# Altium PCB localizationBoard.PcbDoc
Units mm, origin at the board's own origin, x right, y up, seen from the top; angles counter-clockwise.
Board outline 152.4 x 101.6 mm, 2 copper layers (Top Layer, Bottom Layer); 48 components, 29 nets, 220 pads, 0 vias.
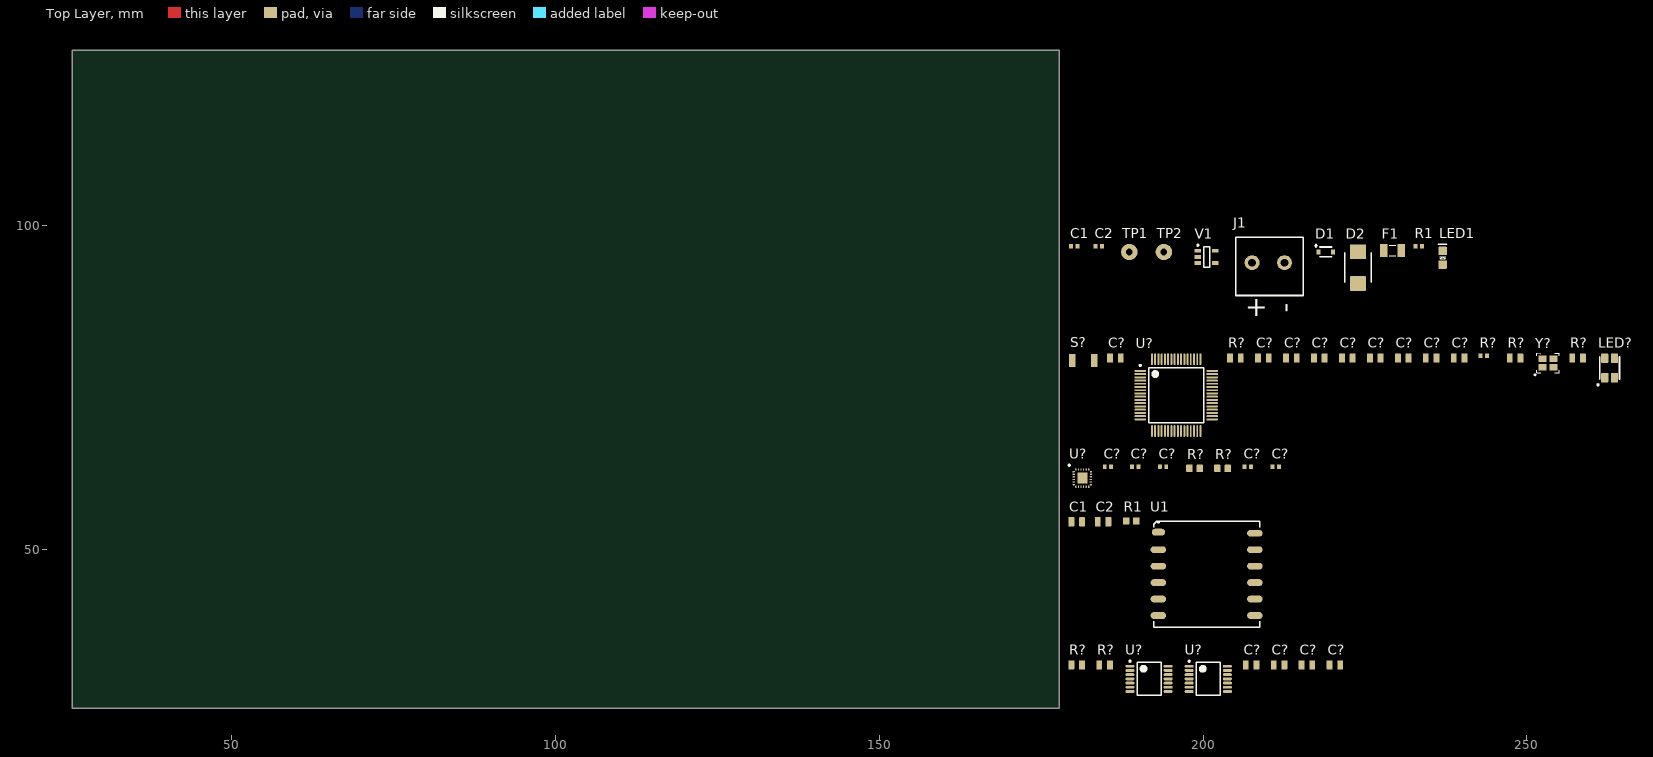
[diagram p0: Top Layer view]
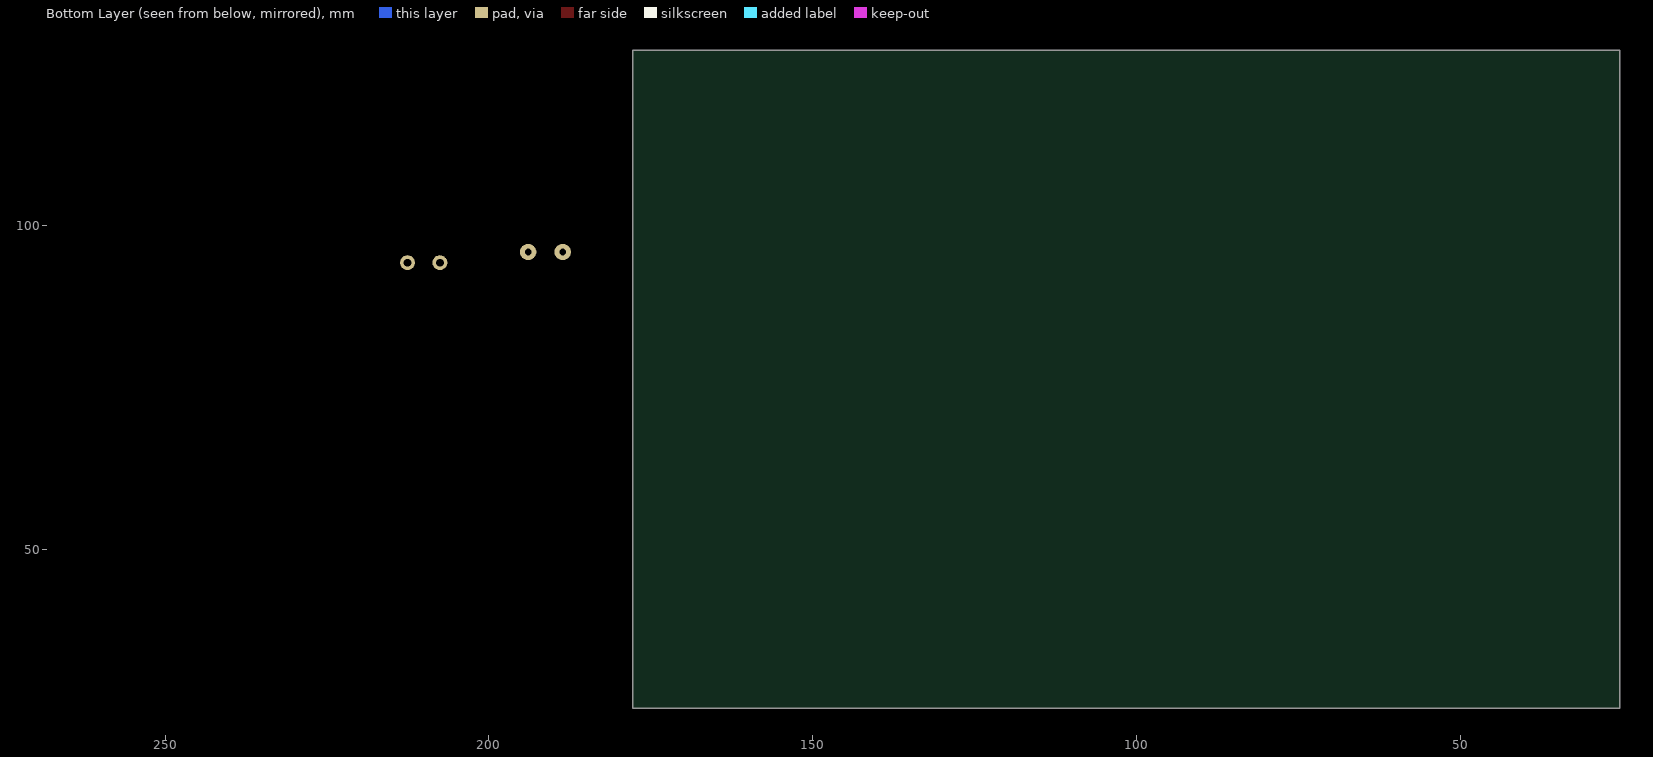
[diagram p1: Bottom Layer view, seen from below]

## Layer stack, top to bottom
Top Solder: solder mask 0.0102, Solder Resist, Dk 3.5
Top Layer: signal copper 0.0356
Dielectric 1: dielectric 0.32, FR-4, Dk 4.8
Bottom Layer: signal copper 0.0356
Bottom Solder: solder mask 0.0102, Solder Resist, Dk 3.5

## Board outline
25.4,25.4 177.8,25.4 177.8,127 25.4,127

## Design rules (kind name [scope] priority, off if disabled: settings)
Clearance [All] p1: gap=0.254 ignorepadtopadclearanceinfootprint=FALSE except(0: Arc-Hole Track-Hole SMDPad-Hole THPad-Hole Via-Hole Fill-Hole Poly-Hole Region-Hole Text-Hole)
PolygonConnect [All] p1: connectstyle=Relief reliefconductorwidth=0.254 reliefentries=4 polygonreliefangle="90 Angle" airgapwidth=0.254
RoutingVias [All] p1: holewidth=0.711 width=1.27 viastyle="Through Hole" minholewidth=0.711 minwidth=1.27 maxholewidth=0.711 maxwidth=1.27
SolderMaskExpansion [All] p1: expansion=0.102 istentingtop=FALSE
Width [All] p1: maxlimit=0.254 minlimit=0.254 preferedwidth=0.254
30 further rules are at their usual default settings.

## Components (designator, comment, footprint, x,y, rotation, side; value= is the part's Value field where it differs from the comment)
C1 "CAP_4.7uF_50V_0805" CAP0805 180.467,54.229 r0 top value=4.7μF
C1 "CAP_1UF_10V_0402_X5R" CAP0402 180.086,96.774 r0 top
C2 "CAP_0.1uF_50V_0805" CAP0805 184.531,54.229 r0 top value=0.1μF
C2 "CAP_1UF_10V_0402_X5R" CAP0402 183.896,96.774 r0 top
C? "CAP_1UF_10V_0402_X5R" CAP0402 206.883,62.738 r0 top
C? "CAP_1UF_10V_0402_X5R" CAP0402 193.802,62.738 r0 top
C? "CAP_1UF_10V_0402_X5R" CAP0402 211.201,62.738 r0 top
C? "CAP_0.1uF_100V_0805" CAP0805 186.436,79.502 r0 top value=0.1µF
C? "CAP_1UF_10V_0402_X5R" CAP0402 189.484,62.738 r0 top
C? "CAP_0.1uF_10V_0805" CAP0805 207.391,32.131 r0 top value=0.1uF
C? "CAP_0.1uF_10V_0805" CAP0805 211.709,32.131 r0 top value=0.1uF
C? "CAP_0.1uF_10V_0805" CAP0805 220.345,32.131 r0 top value=0.1uF
C? "CAP_1UF_10V_0402_X5R" CAP0402 185.293,62.738 r0 top
C? "CAP_0.1uF_10V_0805" CAP0805 216.027,32.131 r0 top value=0.1uF
C? "CAP_0.1uF_50V_0805" CAP0805 209.296,79.502 r0 top value=0.1μF
C? "CAP_1uF_50V_0805" CAP0805 235.204,79.502 r0 top value=1μF
C? "CAP_0.1uF_50V_0805" CAP0805 213.614,79.502 r0 top value=0.1μF
C? "CAP_0.1uF_50V_0805" CAP0805 230.886,79.502 r0 top value=0.1μF
C? "CAP_0.1uF_50V_0805" CAP0805 217.932,79.502 r0 top value=0.1μF
C? "CAP_4.7uF_50V_0805" CAP0805 226.568,79.502 r0 top value=4.7μF
C? "CAP_0.1uF_50V_0805" CAP0805 222.25,79.502 r0 top value=0.1μF
C? "CAP_0.1uF_50V_0805" CAP0805 239.522,79.502 r0 top value=0.1μF
D1 "DIO_SCHOTTKY_30V_800mA" SOD-323_UNIDIR 218.948,95.885 r0 top
D2 "TVS_DIODE_BIDIR_5V" TVS_DIODE_BIDIR_SMB 223.901,93.472 r90 top
F1 "FUSE_1A_1206" FUSE_1206 229.235,96.139 r0 top
J1 "CON_2POS_SCREW_TERM" 1935161 210.058,94.234 r0 top
LED1 "LED_GREEN" LED_0805_GREEN 236.982,94.996 r90 top
LED? "LED_RGB" LED_RGB 262.763,77.978 r0 top
R1 "RES_1kΩ_0603_5%" RES0603 188.087,54.356 r0 top value=1kΩ
R1 "" RES0402 233.299,96.774 r0 top value=120Ω
R? "RES_10kΩ_0603_5%" RES0603 197.866,62.484 r0 top value=10kΩ
R? "RES_10kΩ_0603_5%" RES0603 202.184,62.484 r0 top value=10kΩ
R? "RES_51kΩ_0805_5%" RES0805 184.785,32.131 r0 top value=51kΩ
R? "RES_51kΩ_0805_5%" RES0805 180.467,32.131 r0 top value=51kΩ
R? "RES_20Ω_0805_1%" RES0805 248.158,79.502 r0 top value=20Ω
R? "RES_20Ω_0805_1%" RES0805 257.81,79.502 r0 top value=20Ω
R? "RES_10kΩ_0805_5%" RES0805 204.978,79.502 r0 top value=10kΩ
R? "RES_120Ω_0402_5%" RES0402 243.332,79.883 r0 top value=120Ω
S? "SW_SPST_NO" B3U-1000P 181.483,79.121 r0 top
TP1 "TESTPOINT_LOOP" TESTPOINT_LOOP 188.595,95.885 r0 top
TP2 "TESTPOINT_LOOP" TESTPOINT_LOOP 193.929,95.885 r0 top
U1 "GNSS_Reciever_IC" L86_M33_GNSS_Reciever_IC 200.533,46.101 r0 top
U? "TXB0104PWR" "TXB0104PWR 4-bit bidirectional voltage-level translator" 200.787,29.972 r0 top
U? "TXB0104PWR" "TXB0104PWR 4-bit bidirectional voltage-level translator" 191.643,29.972 r0 top
U? "STM32F446RET6" STM_LQFP64_N 195.834,73.787 r0 top
U? "IC_9DOF_IMU_W24" "ICM20948 - 9DOFIMU" 181.356,60.96 r0 top
V1 "NCV8114ASN180T1G" 1.8V_Output_LDO 200.533,95.123 r0 top
Y? "CRYSTAL_25MHZ" SOIC254P1016X440-4N 253.238,78.74 r0 top

## Footprints (in the part's own frame and the unit in brackets; to place one, negate y for a bottom-side part, rotate by r counter-clockwise, add the part's x,y. Pads: shape width x height; smd on the part's side, far side on the other; paste and mask are expansions set on the pad)
1.8V_Output_LDO [mm] "Linear Voltage Regulator IC Positive Fixed 1 Output 300mA 5-TSOP"
  rect 1x0.6 smd: 1(-1.35,0.95) 2(-1.35,0) 3(-1.35,-0.95) 4(1.35,-0.95) 6(1.35,0.95)
  silkscreen extent -1.47,-1.6 0.45,1.92, body extent -0.85,-1.6 0.85,1.6, height 1.1
1935161 [mm] "TERM BLK 2POS SIDE ENTRY 5MM PCB"
  round 2.3 hole 1.2: 1(-2.5,0) 2(2.5,0)
  silkscreen extent -5.01,-5.06 5.39,3.94, body extent -5.01,-5.06 5.39,3.94, height 11.41
B3U-1000P [mm] "TACTILE SWITCH GREY"
  rrect15% 1x2 smd: 1(-1.7,0) 2(1.7,0)
  body extent -2,-1.25 2,1.25, height 1.6
CAP0402 [mm] "Chip Capacitor, Body 1x0.5mm, Height 0.35mm, IPC Medium Density"
  rrect15% 0.6x0.7 smd: 1(-0.5,0) 2(0.5,0)
  body extent -0.52,-0.28 0.52,0.28, height 0.54
CAP0805 [mm] "Chip Capacitor, Body 2.0x1.2mm, Height 0.45mm, IPC Medium Density"
  rrect15% 0.9x1.4 smd: 1(-0.825,0) 2(0.825,0)
  body extent -1.1,-0.73 1.1,0.73, height 1.39
FUSE_1206 [mil]
  rect 45x80 smd mask+1: 1(-52.5,0) 2(52.5,0)
  silkscreen extent -20,-32 20,32, body extent -65,-32 65,32, height 32
"ICM20948 - 9DOFIMU" [mm] "Accelerometer, Gyroscope, Magnetometer, 9 Axis Sensor I2C, SPI Output"
  oval 0.35x0.2 smd: 1(-1.35,1) 2(-1.35,0.6) 3(-1.35,0.2) 4(-1.35,-0.2) 5(-1.35,-0.6) 6(-1.35,-1) 13(1.3,-1) 14(1.3,-0.6) 15(1.3,-0.2) 16(1.3,0.2) 17(1.3,0.6) 18(1.3,1)
  oval 0.2x0.35 smd: 7(-1.025,-1.325) 8(-0.625,-1.325) 9(-0.225,-1.325) 10(0.175,-1.325) 11(0.575,-1.325) 12(0.975,-1.325) 19(0.975,1.325) 20(0.575,1.325) 21(0.175,1.325) 22(-0.225,1.325) 23(-0.625,1.325) 24(-1.025,1.325)
  rect 1.54x1.7 smd: 25(-0.025,0)
  silkscreen extent -2.15,1.88 -1.9,2.12, body extent -1.58,-1.55 1.52,1.55, height 1.05
L86_M33_GNSS_Reciever_IC [mm] "Navigation Galileo, GLONASS, GPS, GNSS Transceiver Module 1.575GHz, 1.601GHz Integrated, Ceramic Patch Surface Mount"
  oval 2.05x1.05 smd: 1(-7.45,6.525)
  oval 2.4x1.05 smd: 2(-7.45,3.81) 3(-7.45,1.27) 4(-7.45,-1.27) 5(-7.45,-3.81) 6(-7.45,-6.35) 7(7.45,-6.35) 8(7.45,-3.81) 9(7.45,-1.27) 10(7.45,1.27) 11(7.45,3.81) 12(7.45,6.35)
  silkscreen extent -8.2,-8.2 8.2,8.22, body extent -8,-8 8,8, height 7.15
LED_0805_GREEN [mm] "SMD, 2-Leads, Body 2x1.25mm"
  rrect20% 1.3x1.3 smd: 1(-1.05,0) 2(1.05,0)
  silkscreen extent -0.18,-0.63 2.11,0.64, body extent -1,-0.62 1,0.63, height 1.12
LED_RGB [mm]
  rrect20% 1.1x1.5 smd: 1(-0.75,-1.5) 2(-0.75,1.5) 3(0.75,1.5) 4(0.75,-1.5)
  silkscreen extent -1.92,-2.72 1.53,1.7, body extent -1.4,-1.75 1.4,1.75, height 1.89
RES0402 [mm] "Chip Resistor, Body 1x0.5mm, IPC Medium Density"
  rrect15% 0.6x0.7 smd: 1(-0.5,0) 2(0.5,0)
  body extent -0.5,-0.25 0.5,0.25, height 0.27
RES0603 [mm] "Chip Resistor, Body 1.6x0.8mm, IPC Medium Density"
  rrect15% 1x1.1 smd: 1(0,0) 2(1.6,0)
  body extent 0,-0.4 1.6,0.4, height 0.46
RES0805 [mm] "Chip Resistor, 2-Leads, Body 2.00x1.25mm, IPC High Density"
  rrect15% 0.9x1.4 smd: 1(-0.825,0) 2(0.825,0)
  body extent -1,-0.62 1,0.63, height 0.61
SOD-323_UNIDIR [mm]
  rect 0.63x0.83 smd: 1(-1.115,0) 2(1.115,0)
  silkscreen extent -1.73,-0.76 0.9,1.17, body extent -1.24,-0.62 1.24,0.62, height 1.1
SOIC254P1016X440-4N [mm]
  rrect15% 1.25x1 smd: 1(-0.85,-0.65) 2(0.85,-0.65) 3(0.85,0.65) 4(-0.85,0.65)
  silkscreen extent -2.11,-1.93 1.75,1.47, body extent -1.24,-0.85 1.24,0.85, height 0.56
STM_LQFP64_N [mm] "Thin QFP, 64-Leads, Body 10x10mm, Pitch 0.5mm, IPC Medium Density"
  oval 1.8x0.3 smd mask+0.05: 1(-5.55,3.75) 2(-5.55,3.25) 3(-5.55,2.75) 4(-5.55,2.25) 5(-5.55,1.75) 6(-5.55,1.25) 7(-5.55,0.75) 8(-5.55,0.25) 9(-5.55,-0.25) 10(-5.55,-0.75) 11(-5.55,-1.25) 12(-5.55,-1.75) 13(-5.55,-2.25) 14(-5.55,-2.75) 15(-5.55,-3.25) 16(-5.55,-3.75) 33(5.55,-3.75) 34(5.55,-3.25) 35(5.55,-2.75) 36(5.55,-2.25) 37(5.55,-1.75) 38(5.55,-1.25) 39(5.55,-0.75) 40(5.55,-0.25) 41(5.55,0.25) 42(5.55,0.75) 43(5.55,1.25) 44(5.55,1.75) 45(5.55,2.25) 46(5.55,2.75) 47(5.55,3.25) 48(5.55,3.75)
  oval 0.3x1.8 smd mask+0.05: 17(-3.75,-5.55) 18(-3.25,-5.55) 19(-2.75,-5.55) 20(-2.25,-5.55) 21(-1.75,-5.55) 22(-1.25,-5.55) 23(-0.75,-5.55) 24(-0.25,-5.55) 25(0.25,-5.55) 26(0.75,-5.55) 27(1.25,-5.55) 28(1.75,-5.55) 29(2.25,-5.55) 30(2.75,-5.55) 31(3.25,-5.55) 32(3.75,-5.55) 49(3.75,5.55) 50(3.25,5.55) 51(2.75,5.55) 52(2.25,5.55) 53(1.75,5.55) 54(1.25,5.55) 55(0.75,5.55) 56(0.25,5.55) 57(-0.25,5.55) 58(-0.75,5.55) 59(-1.25,5.55) 60(-1.75,5.55) 61(-2.25,5.55) 62(-2.75,5.55) 63(-3.25,5.55) 64(-3.75,5.55)
  silkscreen extent -5.67,-4.25 4.25,4.7, body extent -6,-5.99 6,6.01, height 1.56
TESTPOINT_LOOP [mm]
  round 2.54 hole 1.02: 1(0,0)
  body extent -1.27,-1.27 1.27,1.27, height 4.57
TVS_DIODE_BIDIR_SMB [mm] "DO-214AA, SMB"
  rrect15% 2.3x2.5 smd: 1(-2.45,0) 2(2.45,0)
  silkscreen extent -2.25,-2.03 2.25,2.03, body extent -2.7,-1.8 2.7,1.8, height 2.27
"TXB0104PWR 4-bit bidirectional voltage-level translator" [mm] "Voltage Level Translator Bidirectional 1 Circuit 4 Channel 100Mbps 14-TSSOP"
  oval 1.4x0.45 smd: 1(-2.95,1.95) 2(-2.95,1.3) 3(-2.95,0.65) 4(-2.95,0) 5(-2.95,-0.65) 6(-2.95,-1.3) 7(-2.95,-1.95) 8(2.95,-1.95) 9(2.95,-1.3) 10(2.95,-0.65) 11(2.95,0) 12(2.95,0.65) 13(2.95,1.3) 14(2.95,1.95)
  silkscreen extent -3.07,-2.55 1.85,2.85, body extent -2.75,-2.55 1.75,2.55, height 1.2

## Part data
C1 C?: "CAP CER 4.7UF 50V X5R 0805", Dielectric=X5R, LCSC Part #=C1779, Manufacturer 1="TDK Corporation", Manufacturer Part Number 1=CGA4J3X5R1H475K125AB, Package=0805, Supplier Part Number 1=445-7882-1-ND, Voltage Rating=50V, Mounting Type=SMD, Supplier 1=Digi-Key
C1 C2 C? C? C? C? C?: "CAP CER 1UF 10V X5R 0402", Capacitance=1μF, Manufacturer="Kyocera AVX", Manufacturer Part Number=0402ZD105MAT2A, Package=0402, Rated DC Voltage (URdc)=10V, Supplier Part Number 1=478-5768-1-ND, Temperature Characteristics Code=X5R, ComponentLink7Description=https://datasheet.ciiva.com/11531/cx5r-11531784.pdf?src-supplier=Avnet, ComponentLink7URL=https://datasheet.ciiva.com/11531/cx5r-11531784.pdf?src-supplier=Avnet, Mounting Type="Surface Mount", Supplier 1=Digi-Key
C2 C? C? C? C? C? C?: "CAP CER 0.1UF 50V X7R 0805", Dielectric=X7R, LCSC Part #=C49678, Manufacturer 1="Murata Electronics", Manufacturer Part Number 1=GCM21BR71H104KA37K, Package/Footprint=0805, Supplier Part Number 1=490-8049-1-ND, Voltage Rating=50V, Mounting Type=SMD, Supplier 1=Digi-Key
C?: "CAP CER 0.1UF 100V X7R 0805", Manufacturer 1="TDK Corporation", Manufacturer Part Number 1=C2012X7R2A104K125AA, Package=0805, Supplier Part Number 1=445-1418-1-ND, Voltage Rating=100V, Supplier 1=Digi-Key
C? C? C? C?: "CAP CER 0.1uF 10V 0805", Manufacturer 1=KEMET, Manufacturer Part Number 1=C0805C104K8RAC7800, Package/Footprint=0805, Supplier Part Number 1=399-C0805C104K8RAC7800DKR-ND, Voltage Rating=10V, Supplier 1=Digi-Key
C?: "CAP CER 1UF 50V X7R 0805", LCSC Part #=C28323, Manufacturer 1="Samsung Electro-Mechanics", Manufacturer Part Number 1=CL21B105KBFNNNG, Package=0805, Supplier Part Number 1=1276-6470-1-ND, Voltage Rating=50V, Mounting Type=SMD, Supplier 1=Digi-Key
D1: "DIODE SCHOTTKY 30V 800MA USC", Manufacturer 1="Toshiba Semiconductor and Storage", Manufacturer Part Number 1=CUS08F30,H3F, Supplier Part Number 1=CUS08F30H3FCT-ND, Io=800mA, Mounting Type=SMD, Supplier 1=Digi-Key, Vf (Max)=220mV, Vr (Max)=30V
D2: "TVS DIODE 5V 9.2V SMB", Manufacturer 1=Littelfuse, Manufacturer Part Number 1=SMBJ5.0CA, Package/Footprint=SMB, Supplier Part Number 1=SMBJ5.0CALFCT-ND, Voltage - Breakdown (Min)=6.4V, Voltage - Clamping (Max) @ Ipp=9.2V, Voltage - Reverse Standoff (Typ)=5V, Mounting Type=SMD, Supplier 1=Digi-Key, Verified=No
F1: "FUSE BOARD MOUNT 1A 125VAC 63VDC", Current Rating=1A, Manufacturer 1="Bel Fuse Inc.", Manufacturer Part Number 1="C1Q 1", Package/Footprint=1206, Supplier Part Number 1=507-1077-1-ND, Mounting Type=SMD, Supplier 1=Digi-Key
J1: "TERM BLK 2POS SIDE ENTRY 5MM", Manufacturer 1="Phoenix Contact", Manufacturer Part Number 1=1935161, Package/Footprint=SMD, Supplier Part Number 1=277-1667-ND, Mounting Type=TH, Supplier 1=Digi-Key
LED1: "LED GREEN DIFFUSED 0805 SMD", Forward Voltage Drop=2.2V, Manufacturer 1=OSRAM, Manufacturer Part Number 1="LG R971-KN-1", Package/Footprint=0805, Supplier Part Number 1=475-1410-1-ND, Mounting Type=SMD, Supplier 1=Digi-Key
LED?: "LED RGB DIFFUSED 4PLCC SMD", Color=Blue,Green,Red, Forward Voltage=3.1V, Lens Color=White, Manufacturer 1=Broadcom, Manufacturer Part Number 1=ASMB-MTB1-0B3A2, Package/Footprint=4-PLCC, Supplier Part Number 1=516-ASMB-MTB1-0B3A2CT-ND, Test Current=20mA, Dominant Wavelength=470nm, Lens Style=Round, Lens Transparency=Diffused, Luminous Intensity=350mcd, Mounting Type=SMD, Number of Pins=4, Supplier 1=Digi-Key, Viewing Angle=115°
R1: "RES 1K OHM 5% 1/10W 0603", Manufacturer 1=Yageo, Manufacturer Part Number 1=RC0603JR-071KL, Package=0603, Supplier Part Number 1=311-1.0KGRCT-ND, Mounting Type=SMD, Supplier 1=Digi-Key
R1: library part RES_120Ω_0402_5%, "RES 120 OHM 5% 1/16W 0402", Manufacturer 1=Yageo, Manufacturer Part Number 1=RC0402JR-07120RL, Package/Footprint=0402, Power=1/16W, Supplier Part Number 1=311-120JRCT-ND, Tolerance=5%, Mounting Type=SMD, Supplier 1=Digi-Key
R? R?: "RES 10K OHM 5% 1/10W 0603", Manufacturer 1=Yageo, Manufacturer Part Number 1=RC0603JR-0710KL, Package=0603, Supplier Part Number 1=311-10KGRCT-ND, Mounting Type=SMD, Supplier 1=Digi-Key
R? R?: "RES 51K OHM 1% 1/8W 0805", Manufacturer 1="Vishay Dale", Manufacturer Part Number 1=CRCW080551K0FKEA, Supplier Part Number 1=541-51.0KCCT-ND, Supplier 1=Digi-Key
R? R?: "RES 20 OHM 1% 1/8W 0805", LCSC Part #=C17581, Manufacturer 1=Yageo, Manufacturer Part Number 1=RC0805FR-0720RL, Package=0805, Supplier Part Number 1=311-20.0CRCT-ND, Mounting Type=SMD, Supplier 1=Digi-Key
R?: "RES 10K OHM 5% 1/8W 0805", LCSC Part #=C17414, Manufacturer 1="Panasonic Electronic Components", Manufacturer Part Number 1=ERJ-6GEYJ103V, Package/Footprint=0805, Supplier Part Number 1=P10KACT-ND, Mounting Type=SMD, Supplier 1=Digi-Key
R?: "RES 120 OHM 5% 1/16W 0402", Manufacturer 1=Yageo, Manufacturer Part Number 1=RC0402JR-07120RL, Package/Footprint=0402, Power=1/16W, Supplier Part Number 1=311-120JRCT-ND, Tolerance=5%, Mounting Type=SMD, Supplier 1=Digi-Key
S?: "SMT 3.0 X 2.6 MM TACT SWITCH WIT", Manufacturer 1="Würth Elektronik", Manufacturer Part Number 1=435151014824, Supplier Part Number 1=732-435151014824CT-ND, Mounting Type=SMD, Supplier 1=Digi-Key
TP1 TP2: "TESTPOINT THRUHOLE", Manufacturer 1="Keystone Electronics", Manufacturer Part Number 1=5002, Package/Footprint=TH, Supplier Part Number 1=36-5002-ND, Mounting Type=TH, Supplier 1=Digi-Key
U1: "Navigation Galileo, GLONASS, GPS, GNSS Transceiver Module 1.575GHz, 1.601GHz Integrated, Ceramic Patch Surface Mount", Manufacturer=Quectel, Manufacturer Product Number=L86-M33, Package=LCC, Voltage supply="3V ~ 4.3V", ComponentLink1Description="Digikey Link", ComponentLink1URL=https://www.digikey.ca/en/products/detail/quectel/L86-M33/13278361, ComponentLink2Description="Datasheet Link", ComponentLink2URL=https://www.mouser.ca/datasheet/2/1052/QWSC_S_A0007269014_1-2576162.pdf, Mounting Type="Surface Mount", Supplier=DigiKey
U? U?: library part IC_Bidirectional_Level_Shifter, "Voltage Level Translator Bidirectional 1 Circuit 4 Channel 100Mbps 14-TSSOP", Manufacturer="Texas Instruments", Package=14-TSSOP, ComponentLink1Description=Datasheet, ComponentLink1URL=https://www.digikey.ca/en/products/detail/texas-instruments/TXB0104PWR/1629102, Manufacture product number=TXB0104PWR, Mounting Type="Surface Mount", Supplier=Digikey
U?: "IC MCU 32BIT 512KB FLASH 64LQFP", Manufacturer 1=STMicroelectronics, Manufacturer Part Number 1=LF80CDT-TR, Supplier Part Number 1=497-15376-ND, Supplier 1=Digi-Key
U?: "Accelerometer, Gyroscope, Magnetometer, 9 Axis Sensor I2C, SPI Output", DigiKey Part Number=1428-1123-6-ND, Manufacturer 1="TDK InvenSense", Manufacturer Product Number=ICM-20948, Package / Case="24-TFQFN Module Exposed Pad", Mounting Type="Surface Mount", Supplier=DigiKey
V1: library part 1.8V_Output_LDO, "Linear Voltage Regulator IC Positive Fixed 1 Output 300mA 5-TSOP", Manufacture=onsemi, Output voltage=1.8V, Package="SOT-23-5 Thin, TSOT-23-5", ComponentLink1Description=Datasheet, ComponentLink1URL=https://www.digikey.ca/en/products/detail/onsemi/NCV8114ASN180T1G/7066765, Manufacture part number=NCV8114ASN180T1G, Mounting Type="Surface Mount", Supplier=Digikey
Y?: "CRYSTAL 25.0000MHZ 12PF SMD", Frequency=25MHz, Load Capacitance=12pF, Manufacturer 1="Kyocera AVX", Package/Footprint=SMD, Supplier Part Number 1=1253-1724-1-ND, Mounting Type=SMD, Supplier 1=Digi-Key

## Nets (pads, with @x,y where several pads share a name; then routed paths per layer and width w, separated by ;. In a path a pad name is that pad's centre, name@x,y a point inside that pad or via, vN(x,y) a via of type N, cw(c..) or ccw(c..) an arc to the next point about the centre after c; other vN are vias at no path point)
1V8: 
3.3V: 
"3.3V (Backup battery)": 
3V3: 
GND: 
NetC1_2: 
NetC?_1: 
NetC?_2: 
NetD1_1: 
NetD2_2: 
NetLED1_1: 
NetLED?_1: 
NetLED?_2: 
NetLED?_3: 
NetR?_1: 
NetU1_1: 
NetU1_2: 
NetU1_8: 
NetU1_11: 
NetU?_2: 
NetU?_3: 
NetU?_5: 
NetU?_8: 
NetU?_9: 
NetU?_10: 
NetU?_12: 
NetU?_13: 
NetU?_38: 
NetU?_39: 
pads on no net: C1.1 C1.2 C2.1 C2.2 C?.1 C?.2 D1.1 D1.2 D2.1 D2.2 F1.1 F1.2 J1.1 J1.2 LED1.1 LED1.2 LED?.1 LED?.2 LED?.3 LED?.4 R1.1 R1.2 R?.1 R?.2 S?.1 S?.2 TP1.1 TP2.1 U1.1 U1.2 U1.3 U1.4 U1.5 U1.6 U1.7 U1.8 U1.9 U1.10 U1.11 U1.12 U?.1 U?.2 U?.3 U?.4 U?.5 U?.6 U?.7 U?.8 U?.9 U?.10 U?.11 U?.12 U?.13 U?.14 U?.15 U?.16 U?.17 U?.18 U?.19 U?.20 U?.21 U?.22 U?.23 U?.24 U?.25 U?.26 U?.27 U?.28 U?.29 U?.30 U?.31 U?.32 U?.33 U?.34 U?.35 U?.36 U?.37 U?.38 U?.39 U?.40 U?.41 U?.42 U?.43 U?.44 U?.45 U?.46 U?.47 U?.48 U?.49 U?.50 U?.51 U?.52 U?.53 U?.54 U?.55 U?.56 U?.57 U?.58 U?.59 U?.60 U?.61 U?.62 U?.63 U?.64 V1.1 V1.2 V1.3 V1.4 V1.6 Y?.1 Y?.2 Y?.3 Y?.4

## Text inside footprints (layer, text, board x,y; h text height)
J1: Top Overlay "-" at 214.096,86.487 h3.05 r90; Top Overlay "+" at 206.527,85.979 h3.05